# Altium PCB dummy_planes_prod.PcbDoc
Units mm, origin at the board's own origin, x right, y up, seen from the top; angles counter-clockwise.
Board outline 46.99 x 17.78 mm, 4 copper layers (Top Layer, InternalPlane1, InternalPlane2, Bottom Layer); 40 components, 48 nets, 153 pads, 33 vias.
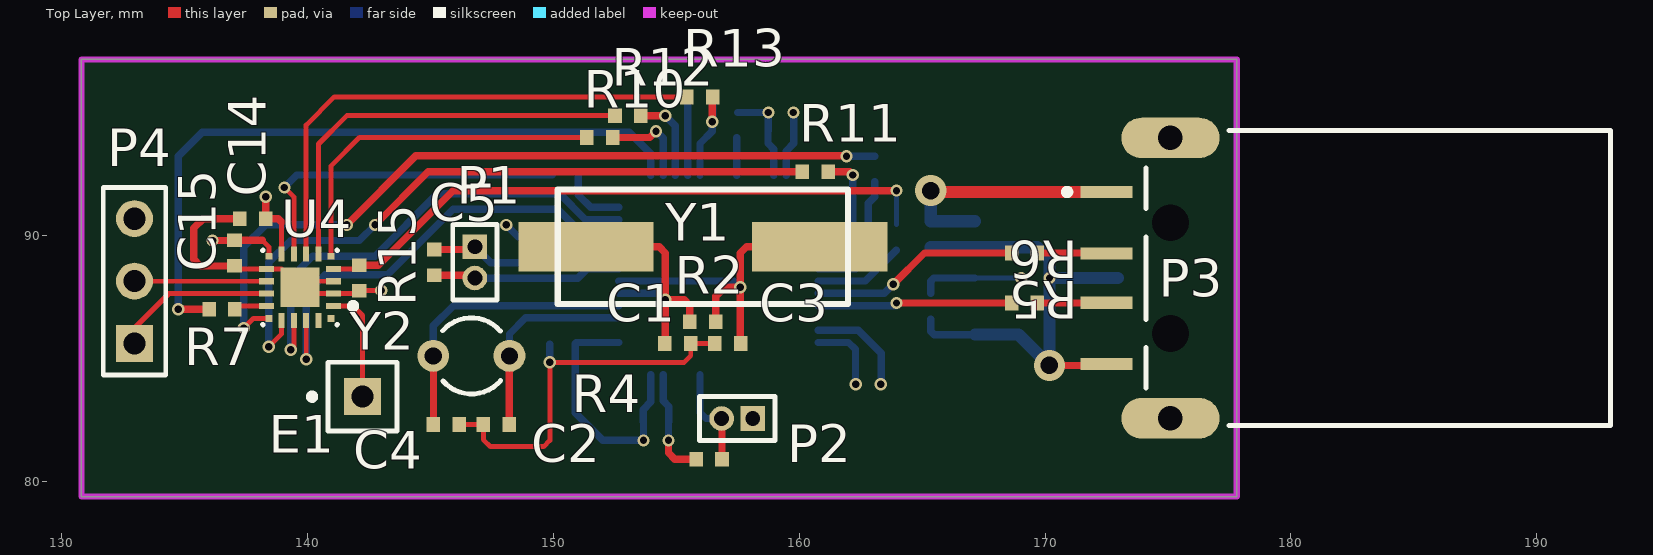
[diagram p0: Top Layer view]
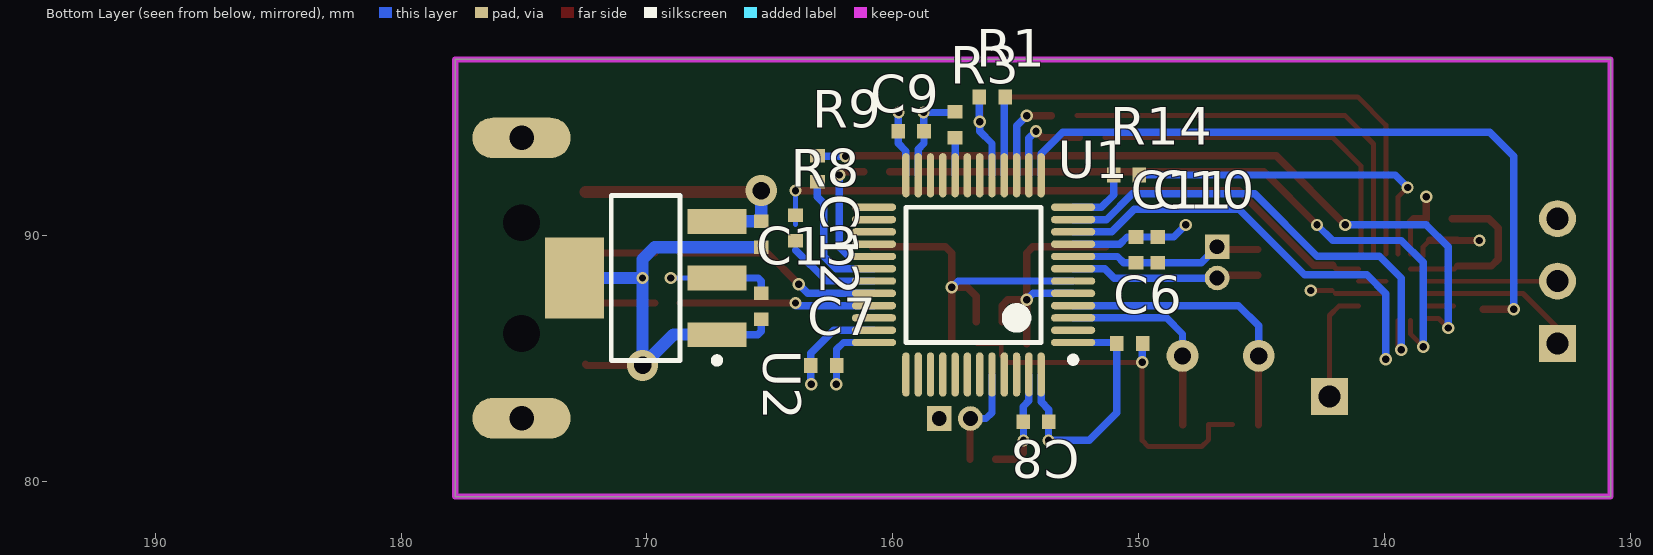
[diagram p1: Bottom Layer view, seen from below]
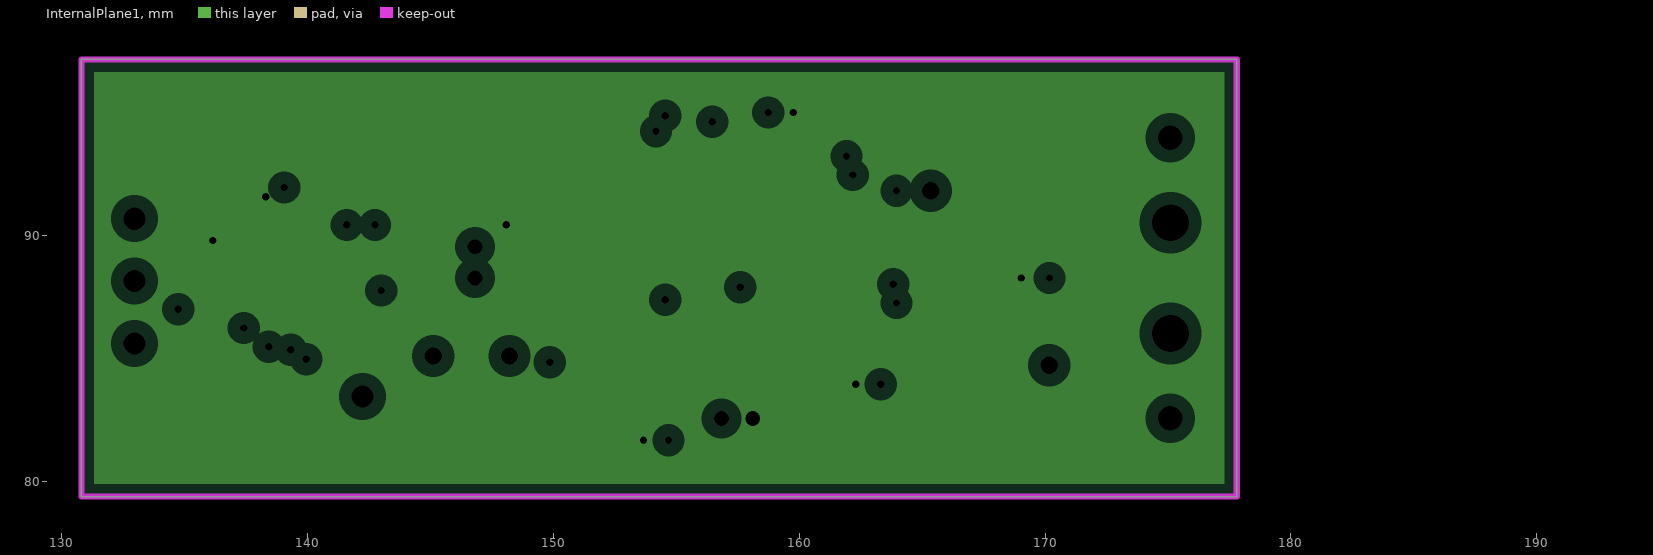
[diagram p2: InternalPlane1, clearances drawn from the general rule]
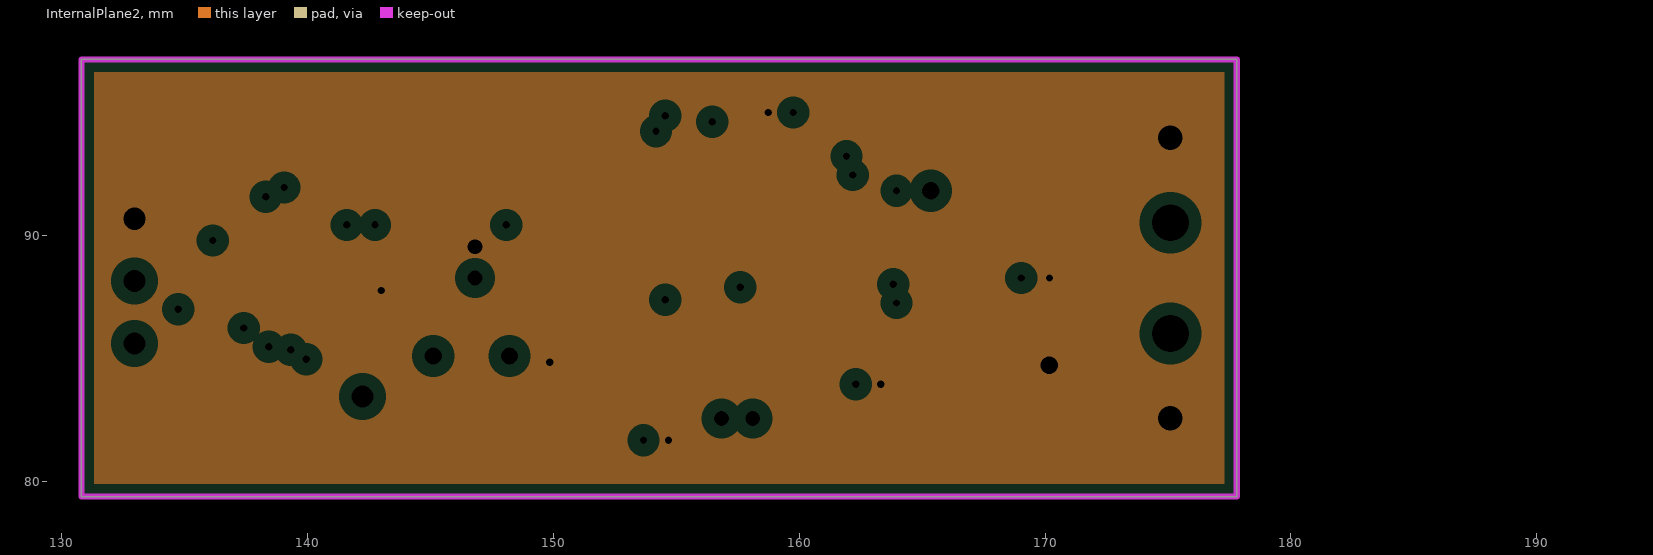
[diagram p3: InternalPlane2, clearances drawn from the general rule]

## Layer stack, top to bottom
Top Layer: signal copper 0.0356
Dielectric: core 0.32, FR-4, Dk 4.8
InternalPlane1: plane copper 0.0356, net +3.3V
Dielectric: prepreg 0.32, FR-4, Dk 4.8
InternalPlane2: plane copper 0.0356, net GND
Dielectric: core 0.32, FR-4, Dk 4.8
Bottom Layer: signal copper 0.0356

## Board outline
130.81,79.375 177.8,79.375 177.8,97.155 130.81,97.155

## Design rules (kind name [scope] priority, off if disabled: settings)
Clearance [All] p1: gap=0.2
DiffPairsRouting [All] p1: maxlimit=0.254 minlimit=0.254 mostfreqgap=0.254 maxuncoupledlength=12.7
PlaneClearance [All] p1: clearance=0.508
PlaneConnect [All] p1: planeconnectstyle=Relief reliefexpansion=0.508 reliefentries=4 reliefconductorwidth=0.3 reliefairgap=0.254
PolygonConnect [All] p1: connectstyle=Relief reliefconductorwidth=0.3 reliefentries=4 polygonreliefangle="90 Angle"
RoutingVias [All] p1: holewidth=0.711 width=1.27 viastyle="Through Hole" minholewidth=0.711 minwidth=1.27 maxholewidth=0.711 maxwidth=1.27
SilkscreenOverComponentPads [All] p1: minsilkscreentomaskgap=0.254
SolderMaskExpansion [All] p1: expansion=0.102
Width [All] p1: maxlimit=0.5 minlimit=0.2 preferedwidth=0.3 minimp=50.000000 maximp=50.000000 favimp=50.000000
24 further rules are at their usual default settings.

## Classes and differential pairs
component class core: C1 C2 C3 C4 C5 C6 C7 C8 C9 C10 C11 P1 P2 R1 R2 R3 R4 U1 Y1 Y2
component class hole_field_direct: C14 C15 E1 P4 R7 R8 R9 R10 R11 R12 R13 R14 R15 U4
component class usb_connector: C12 C13 P3 R5 R6 U2
differential pair USB_D: +USB_D_P -USB_D_N

## Components (designator, comment, footprint, x,y, rotation, side; value= is the part's Value field where it differs from the comment)
C1 "27pF" CHIP0402#1 155.067,85.598 r180 top
C2 "10pF" CHIP0402#1 147.684,82.305 r0 top
C3 "27pF" CHIP0402#1 157.099,85.598 r180 top
C4 "10pF" CHIP0402#1 145.652,82.305 r180 top
C5 "100nF" CHIP0402#1 145.161,88.9 r90 top
C6 "100nF" CHIP0402#1 150.368,85.598 r180 bottom
C7 "100nF" CHIP0402#1 162.814,84.709 r0 bottom
C8 "100nF" CHIP0402#1 154.178,82.423 r0 bottom
C9 "100nF" CHIP0402#1 159.258,94.234 r180 bottom
C10 "100nF" CHIP0402#1 149.225,89.408 r90 bottom
C11 "1uF" CHIP0402#1 150.114,89.408 r90 bottom
C12 "Cap" CHIP0402#2 165.354,90.043 r90 bottom
C13 "Cap" CHIP0402#2 165.354,87.122 r90 bottom
C14 "100nF" CHIP0402#2 137.778,90.678 r180 top
C15 "22nF" CHIP0402#2 137.033,89.281 r90 top
E1 "Antenna" PIN1 142.24,83.439 r90 top
P1 "Reset pins" MHDR1X2 146.812,89.535 r270 top
P2 "Boot pins" MHDR1X2 158.115,82.55 r180 top
P3 "1470695-2" 1470695A 177.8,88.265 r0 top
P4 "Header 3" HDR1X3 132.969,85.598 r90 top
R1 "47k" CHIP0402#1 155.956,95.631 r180 bottom
R2 "1M" CHIP0402#1 156.083,86.487 r0 top
R3 "47k" CHIP0402#1 157.468,94.493 r90 bottom
R4 "47k" CHIP0402#1 156.337,80.899 r180 top
R5 "Res1" CHIP0402#2 169.164,89.281 r0 top
R6 "Res1" CHIP0402#2 169.164,87.249 r0 top
R7 "600" CHIP0402#2 136.525,86.995 r180 top
R8 "2k" CHIP0402#2 163.957,90.297 r90 bottom
R9 "2k" CHIP0402#2 163.068,92.71 r270 bottom
R10 "2k" CHIP0402#2 151.892,93.98 r180 top
R11 "2k" CHIP0402#2 160.655,92.583 r0 top
R12 "2k" CHIP0402#2 153.035,94.869 r180 top
R13 "2k" CHIP0402#2 155.956,95.631 r180 top
R14 "2k" CHIP0402#2 150.495,92.456 r180 bottom
R15 "47k" CHIP0402#2 142.113,88.265 r90 top
U1 "STM32F103C8T6" LQFP48_N 156.718,88.392 r0 bottom
U2 "LM1117IMP-3.3" MP04A_N 170.053,88.265 r0 bottom
U4 "Si4705" QFN50P300X300X60-20N 139.7,87.884 r180 top
Y1 "8Mhz" HC-49-SMD 156.083,89.535 r180 top
Y2 "32758" R38 146.668,85.099 r90 top

## Footprints (in the part's own frame and the unit in brackets; to place one, negate y for a bottom-side part, rotate by r counter-clockwise, add the part's x,y. Pads: shape width x height; smd on the part's side, far side on the other; paste and mask are expansions set on the pad)
1470695A [mm] "Connector; USB1.1, Type A, SM; 4 Position; Right Angle"
  rect 2.1x0.5 smd: 1(-5.3,3.5) 2(-5.3,1) 3(-5.3,-1) 4(-5.3,-3.5)
  oval 4x1.65 hole 1: 5(-2.7,-5.7) 6(-2.7,5.7)
  round 1.2 hole 1.5 unplated: MH1(-2.7,-2.25) MH2(-2.7,2.25)
  silkscreen extent -7.02,-6 15.2,6
CHIP0402#1 [mm] "Chip Resistor, 2-Leads, Body 1,0x0,5mm, IPC High Density"
  rect 0.55x0.6 smd: 1(0.525,0) 2(-0.525,0)
  body extent -0.5,-0.25 0.5,0.25, height 0.35
CHIP0402#2 [mm] "Chip Resistor, 2-Leads, Body 1,0x0,5mm, IPC High Density"
  rect 0.55x0.6 smd: 1(-0.525,0) 2(0.525,0)
  body extent -0.5,-0.25 0.5,0.25, height 0.35
HC-49-SMD [mm]
  rect 5.5x2 smd: 1(-4.75,0) 2(4.75,0)
  silkscreen extent -5.9,-2.33 5.9,2.33
HDR1X3 [mm] "Connector; Header; 3 Position"
  rect 1.5x1.5 hole 0.9: 1(0,0)
  round 1.5 hole 0.9: 2(2.54,0) 3(5.08,0)
  silkscreen extent -1.27,-1.27 6.35,1.27
LQFP48_N [mm] "Thin QFP, 48-Leads, Body 7x7mm, Pitch 0.5mm, IPC Medium Density"
  oval 1.8x0.3 smd: 1(-4.05,2.75) 2(-4.05,2.25) 3(-4.05,1.75) 4(-4.05,1.25) 5(-4.05,0.75) 6(-4.05,0.25) 7(-4.05,-0.25) 8(-4.05,-0.75) 9(-4.05,-1.25) 10(-4.05,-1.75) 11(-4.05,-2.25) 12(-4.05,-2.75) 25(4.05,-2.75) 26(4.05,-2.25) 27(4.05,-1.75) 28(4.05,-1.25) 29(4.05,-0.75) 30(4.05,-0.25) 31(4.05,0.25) 32(4.05,0.75) 33(4.05,1.25) 34(4.05,1.75) 35(4.05,2.25) 36(4.05,2.75)
  oval 0.3x1.8 smd: 13(-2.75,-4.05) 14(-2.25,-4.05) 15(-1.75,-4.05) 16(-1.25,-4.05) 17(-0.75,-4.05) 18(-0.25,-4.05) 19(0.25,-4.05) 20(0.75,-4.05) 21(1.25,-4.05) 22(1.75,-4.05) 23(2.25,-4.05) 24(2.75,-4.05) 37(2.75,4.05) 38(2.25,4.05) 39(1.75,4.05) 40(1.25,4.05) 41(0.75,4.05) 42(0.25,4.05) 43(-0.25,4.05) 44(-0.75,4.05) 45(-1.25,4.05) 46(-1.75,4.05) 47(-2.25,4.05) 48(-2.75,4.05)
  silkscreen extent -4.17,-2.75 2.75,3.57, body extent -3.5,-3.5 3.5,3.5, height 1.6
MHDR1X2 [mm] "Connector; Header; 2 Position"
  rect 1x1 hole 0.6: 1(0,0)
  round 1 hole 0.6: 2(1.27,0)
  silkscreen extent -0.9,-0.9 2.17,0.9
MP04A_N [mm] "SOT223, 4-Leads, Body 6.5x3.5mm, Pitch 2.3mm, Lead Span 7mm, IPC Medium Density"
  rect 2.4x1 smd: 1(-2.9,2.3) 2(-2.9,0) 3(-2.9,-2.3)
  rect 2.4x3.3 smd: 4(2.9,0)
  silkscreen extent -3.02,-3.35 1.4,3.47, body extent -1.85,-3.35 1.85,3.35, height 1.8
PIN1 [mm] "Generic Antenna; 1 Lead"
  rect 1.5x1.5 hole 0.9: 1(0,0)
  silkscreen extent -1.4,-1.4 1.4,2.17
QFN50P300X300X60-20N [mm] "QFN, 20-Leads, Body 3,0x3,0mm (max), Pitch 0,50mm, IPC Medium Density"
  rect 1.6x1.6 smd: 0(0,0)
  rect 0.28x0.28 smd: 1(-1.265,1.265) 6(-1.265,-1.265) 11(1.265,-1.265) 16(1.265,1.265)
  rect 0.61x0.25 smd: 2(-1.355,0.75) 3(-1.355,0.25) 4(-1.355,-0.25) 5(-1.355,-0.75) 12(1.355,-0.75) 13(1.355,-0.25) 14(1.355,0.25) 15(1.355,0.75)
  rect 0.25x0.61 smd: 7(-0.75,-1.355) 8(-0.25,-1.355) 9(0.25,-1.355) 10(0.75,-1.355) 17(0.75,1.355) 18(0.25,1.355) 19(-0.25,1.355) 20(-0.75,1.355)
  silkscreen extent -2.28,-1.53 1.53,1.53, body extent -1.5,-1.5 1.5,1.5, height 0.6
R38 [mm] "Crystal, Thru-Hole; 2 Leads; Body 3.1 x 8.2 mm (Dia.xH)"
  round 1.3 hole 0.7: 1(0,1.55) 2(0,-1.55)
  silkscreen extent -1.55,-1.19 1.55,1.17

## Part data
C1 C2 C3 C4 C5 C6 C7 C8 C9 C10 C11 C14 C15: library part Cap, "Capacitor"
C12 C13: "Capacitor"
E1: "Generic Antenna"
P1 P2: library part MHDR1X2, "Header, 2-Pin"
P3: "USB 1.1, Right Angle, SMT, A Type, Plug, 4 Position, Natural"
P4: "Header, 3-Pin"
R1 R2 R3 R4 R7 R8 R9 R10 R11 R12 R13 R14 R15: library part Res1, "Resistor"
R5 R6: "Resistor"
U1: "STM32 ARM-based 32-bit MCU with 64 Kbytes Flash, 48-pin LQFP, Industrial Temperature"
U2: "800mA Low-Dropout Linear Regulator"
Y1 Y2: library part HC-49-SMD

## Via types
v1: diameter 0.5, hole 0.3, Top Layer to Bottom Layer, 31 vias
v2: diameter 1.27, hole 0.711, Top Layer to Bottom Layer, 2 vias

## Nets (pads, with @x,y where several pads share a name; then routed paths per layer and width w, separated by ;. In a path a pad name is that pad's centre, name@x,y a point inside that pad or via, vN(x,y) a via of type N, cw(c..) or ccw(c..) an arc to the next point about the centre after c; other vN are vias at no path point)
+3.3V: C6.2 C7.2 C8.2 C9.2 C10.1 C11.1 C13.2 C14.1 C15.2 P2.1 U1.1 U1.9 U1.24 U1.36 U1.48 U2.2 U4.10 U4.11 | length 31.1
  Top Layer w0.2: 138.159,89.806 138.435,89.53 U4.11 ; U4.10 138.95,90.539
  Top Layer w0.3: v1(136.144,89.789) C15.2@137.016,89.789 ; C15.2 138.159,89.806 ; v1(138.303,91.567) C14.1 138.811,90.678 138.95,90.539
  Bottom Layer w0.2: U2.2 v1(169.037,88.265)
  Bottom Layer w0.3: v1(148.082,90.424) 148.573,89.933 C10.1 C11.1 150.478,89.933 150.769,89.642 U1.9 ; C6.2 150.893,82.787 152.019,81.661 v1(153.67,81.661) C8.2@153.67,82.406 ; C6.2@150.937,85.642 U1.1 ; C8.2 153.653,82.914 153.968,83.229 U1.48 ; U1.24 159.468,93.428 159.783,93.743 C9.2 v1@159.783,94.979 ; U1.36 162.008,85.642 162.289,85.361 C7.2 v1@162.289,83.964 ; C13.2 165.354,88.138 165.481,88.265 U2.2
  other v1: 162.306,83.947 159.766,94.996
+5V: C12.2 P3.1 U2.3 | length 10.1
  Top Layer w0.5: v2@165.41,91.765 P3.1
  Bottom Layer w0.5: v2(165.354,91.821) C12.2 U2.3@167.15,90.568
BOOT0: P2.2 R4.2 U1.44 | length 4.2
  Top Layer w0.3: P2.2 156.862,82.533 R4.2
  Bottom Layer w0.3: U1.44 155.968,82.792 156.21,82.55 P2.2
BOOT1: R3.2 U1.20 | length 1.5
  Bottom Layer w0.3: U1.20 R3.2
C_AUX1: U1.45
C_AUX2: U1.46
C_AUX3: U1.21
C_AUX4: U1.22
C_RF_DCLK: R11.2 U1.29 | length 5.5
  Top Layer w0.3: R11.2 162.052,92.583 v1(162.179,92.456)
  Bottom Layer w0.3: U1.29 161.786,89.142 162.179,89.535 v1(162.179,92.456)
C_RF_DFS: R9.2 U1.30 | length 5.4
  Bottom Layer w0.3: U1.30 162.302,88.642 162.814,89.154 162.814,91.313 163.068,91.567 R9.2
C_RF_DOUT: R7.2 U1.13 | length 28.3
  Top Layer w0.3: v1(134.747,86.995) R7.2
  Bottom Layer w0.3: v1(134.747,86.995) 134.747,93.218 135.728,94.199 153.093,94.199 153.968,93.324 U1.13
C_RF_GPO1: U1.10 U4.19 | length 18.7
  Top Layer w0.2: U4.19 139.954,86.525 v1(139.954,84.963)
  Bottom Layer w0.3: v1(139.954,84.963) 139.954,87.63 140.716,88.392 143.256,88.392 145.923,91.059 150.186,91.059 151.103,90.142 U1.10
C_RF_GPO2: U1.11 U4.18 | length 19.4
  Top Layer w0.2: v1(139.319,85.344) 139.45,85.475 U4.18
  Bottom Layer w0.3: v1(139.319,85.344) 139.319,88.265 140.208,89.154 142.748,89.154 145.288,91.694 150.258,91.694 151.31,90.642 U1.11
C_RF_RCLK: R14.1 U1.12 | length 3.7
  Bottom Layer w0.3: R14.1 151.02,91.639 151.517,91.142 U1.12 151.682,91.142
C_RF_RESET: R8.1 U1.31 | length 3.7
  Bottom Layer w0.3: U1.31 162.691,88.142 163.948,89.399
C_RF_SCLK: R12.1 U1.15 | length 3.6
  Top Layer w0.3: R12.1 v1(154.559,94.869)
  Bottom Layer w0.3: v1(154.559,94.869) 154.968,94.46 U1.15
C_RF_SDIO: R1.2 R13.1 U1.17 | length 4.4
  Top Layer w0.3: v1(156.464,94.615) R13.1@156.464,95.614
  Bottom Layer w0.3: U1.17 155.968,93.738 156.464,94.234 v1(156.464,94.615) ; v1@156.481,94.632 R1.2
C_RF_SS: R10.1 U1.14 | length 3.8
  Top Layer w0.3: R10.1 153.924,93.98 v1(154.178,94.234)
  Bottom Layer w0.3: v1(154.178,94.234) 154.468,93.944 U1.14
GND: C1.2 C2.2 C3.1 C4.2 C5.1 C6.1 C7.1 C8.1 C9.1 C10.2 C11.2 C12.1 C13.1 C14.2 C15.1 P1.1 P3.4 P3.5 P3.6 P4.3 R3.1 R4.1 R15.1 U1.8 U1.23 U1.35 U1.47 U2.1 U2.4 U4.0 U4.3 U4.4 U4.12 | length 67.4
  Top Layer w0.2: C15.1@137.155,88.634 U4.12 U4.0@138.95,88.634 ; U4.0@139.95,87.634 U4.3 R15.1@142.007,87.634 ; U4.0@139.95,88.134 U4.4 ; R15.1@142.13,87.757 v1(143.002,87.757) ; C4.2 C2.2 147.159,81.695 147.447,81.407 149.606,81.407 149.86,81.661 v1(149.86,84.836) 155.321,84.836 155.592,85.107 C1.2 C3.1
  Top Layer w0.3: C15.1 135.653,88.756 135.382,89.027 135.382,90.297 135.763,90.678 C14.2 ; C5.1 P1.1@146.702,89.425 ; v1(154.686,81.661) 154.686,81.153 154.94,80.899 R4.1 ; v2(170.18,84.709) 172.444,84.709 P3.4
  Bottom Layer w0.3: P1.1 147.464,88.883 C10.2 C11.2 150.605,88.883 150.864,89.142 U1.8 ; v1(149.86,84.836) C6.1@149.86,85.581 ; U1.47 154.468,83.276 154.703,83.041 C8.1 ; v1(154.686,81.661) C8.1@154.686,82.406 ; R3.1@157.49,94.996 v1(158.75,94.996) C9.1@158.75,94.251 ; C9.1 158.733,93.743 158.968,93.508 U1.23 ; U1.35 162.397,86.142 163.339,85.2 C7.1 v1@163.339,83.964 ; C13.1 165.354,86.106 165.495,85.965 U2.1
  Bottom Layer w0.5: C12.1 169.689,89.518 170.18,89.027 v1(170.18,88.265) ; U2.1 168.924,85.965 v2(170.18,84.709) v1(170.18,88.265) ; U2.4 v1(170.18,88.265)
  other v1: 163.322,83.947
NetC2_1: C2.1 U1.3 Y2.2 | length 8.4
  Top Layer w0.3: C2.1 Y2.2@148.209,85.09
  Bottom Layer w0.3: Y2.2 148.218,85.988 148.872,86.642 U1.3
NetC4_1: C4.1 U1.4 Y2.1 | length 11.9
  Top Layer w0.3: C4.1 Y2.1@145.127,85.09
  Bottom Layer w0.3: Y2.1 145.118,86.317 145.943,87.142 U1.4
NetE1_1: E1.1 U4.2 | length 4.6
  Top Layer w0.2: U4.2 141.847,87.134 142.24,86.741 E1.1
NetP3_2: P3.2 R5.2 | length 2.8
  Top Layer w0.3: R5.2 P3.2@172.484,89.281
NetP3_3: P3.3 R6.2 | length 2.8
  Top Layer w0.3: R6.2 P3.3@172.484,87.249
NetP4_1: P4.1 U4.14 | length 6.6
  Top Layer w0.2: P4.1 132.969,86.233 134.37,87.634 U4.14
NetP4_2: P4.2 U4.13 | length 5.4
  Top Layer w0.2: P4.2@132.973,88.134 U4.13
NetP5_11: 
NetP5_17: 
NetP5_19: 
NetR1_1: R1.1 U1.16 | length 3.2
  Bottom Layer w0.3: U1.16 R1.1@155.468,95.594
NetR7_1: R7.1 U4.15 | length 1.2
  Top Layer w0.2: R7.1@137.189,87.134 U4.15
NetR9_1: R9.1 U4.16 | length 31.7
  Top Layer w0.2: v1(137.414,86.233) 137.8,86.619 U4.16
  Top Layer w0.3: v1(141.605,90.424) 144.414,93.233 161.91,93.233 v1(161.925,93.218)
  Bottom Layer w0.3: v1(137.414,86.233) 137.414,89.535 138.303,90.424 v1(141.605,90.424) ; v1(161.925,93.218) R9.1@163.068,93.218
NetR10_2: R10.2 U4.6 | length 14.6
  Top Layer w0.2: U4.6 140.965,92.832 142.113,93.98 R10.2
NetR11_1: R11.1 U4.17 | length 27.9
  Top Layer w0.2: v1(138.43,85.471) 138.95,85.991 U4.17
  Top Layer w0.3: v1(142.748,90.424) 144.907,92.583 R11.1
  Bottom Layer w0.3: v1(138.43,85.471) 138.43,88.9 139.319,89.789 142.113,89.789 v1(142.748,90.424)
NetR12_2: R12.2 U4.7 | length 17
  Top Layer w0.2: U4.7 140.45,93.714 141.605,94.869 R12.2
NetR13_2: R13.2 U4.8 | length 21.2
  Top Layer w0.2: U4.8 139.95,94.484 141.097,95.631 R13.2
NetR14_2: R14.2 U4.9 | length 14
  Top Layer w0.2: v1(139.065,91.948) 139.45,91.563 U4.9
  Bottom Layer w0.3: v1(139.065,91.948) 139.573,92.456 R14.2
OSC_IN: C1.1 R2.2 U1.5 Y1.2 | length 10.8
  Top Layer w0.3: Y1.2 154.305,89.535 154.559,89.281 v1(154.559,87.376) ; C1.1 154.559,85.598 v1(154.559,87.376) ; R2.2 155.558,87.139 155.321,87.376 v1(154.559,87.376)
  Bottom Layer w0.3: U1.5 154.293,87.642 v1(154.559,87.376)
OSC_OUT: C3.2 R2.1 U1.6 Y1.1 | length 14.1
  Top Layer w0.3: R2.1 156.608,87.52 156.972,87.884 v1(157.607,87.884) ; C3.2@157.607,85.725 v1(157.607,87.884) ; Y1.1 157.861,89.535 157.607,89.281 v1(157.607,87.884)
  Bottom Layer w0.3: U1.6 157.349,88.142 v1(157.607,87.884)
RF_RESET: R8.2 R15.2 U4.5 | length 25.6
  Top Layer w0.2: U4.5 141.957,88.634 R15.2
  Top Layer w0.3: R15.2 142.892,88.79 145.923,91.821 v1(163.957,91.821)
  Bottom Layer w0.2: 163.957,90.441 v1(163.957,91.821)
RST: C5.2 P1.2 U1.7 | length 7.7
  Top Layer w0.3: C5.2 P1.2@146.812,88.375
  Bottom Layer w0.3: P1.2 146.819,88.258 150.996,88.258 151.38,88.642 U1.7
TCK: U1.37
TDI: U1.38
TDO: U1.39
TMS: U1.34
TRST: U1.40
USB_D_N: R5.1 U1.32 | length 8.5
  Top Layer w0.3: v1(163.83,88.011) 165.1,89.281 R5.1
  Bottom Layer w0.3: U1.32 163.461,87.642 v1(163.83,88.011)
USB_D_P: R6.1 U1.33 | length 7.9
  Top Layer w0.3: v1(163.957,87.249) R6.1
  Bottom Layer w0.3: U1.33 v1@163.957,87.142
pads on no net: P3.MH1 P3.MH2 U1.2 U1.18 U1.19 U1.25 U1.26 U1.27 U1.28 U1.41 U1.42 U1.43 U4.1 U4.20

## Polygon pours and split planes (outlines as drawn)
+3.3V on InternalPlane1 (split plane): 177.29,79.885 131.32,79.885 131.32,96.645 177.29,96.645
GND on InternalPlane2 (split plane): 177.29,79.885 131.32,79.885 131.32,96.645 177.29,96.645

## Keep-outs
Keep-Out Layer:
  the board outline again, w0.254

## Dimensions
130.81,79.375 to 177.8,79.375 on Mechanical 1
177.8,97.155 to 193,94.265 on Mechanical 1
177.8,79.375 to 193,82.265 on Mechanical 1

## Text inside footprints (layer, text, board x,y; h text height)
P3: Mechanical 1 "PCB Edge" at 178.273,83.092 h0.25 r90